# Altium PCB bmsSlavePCB.PcbDoc (part 2 of 2)
Units mil, origin at the board's own origin, x right, y up, seen from the top; angles counter-clockwise.
Board outline 13750 x 2750 mil, 2 copper layers (Top Layer, Bottom Layer); 264 components, 181 nets, 623 pads, 9 vias.
Unrouted connection lines stored in the file: 225.
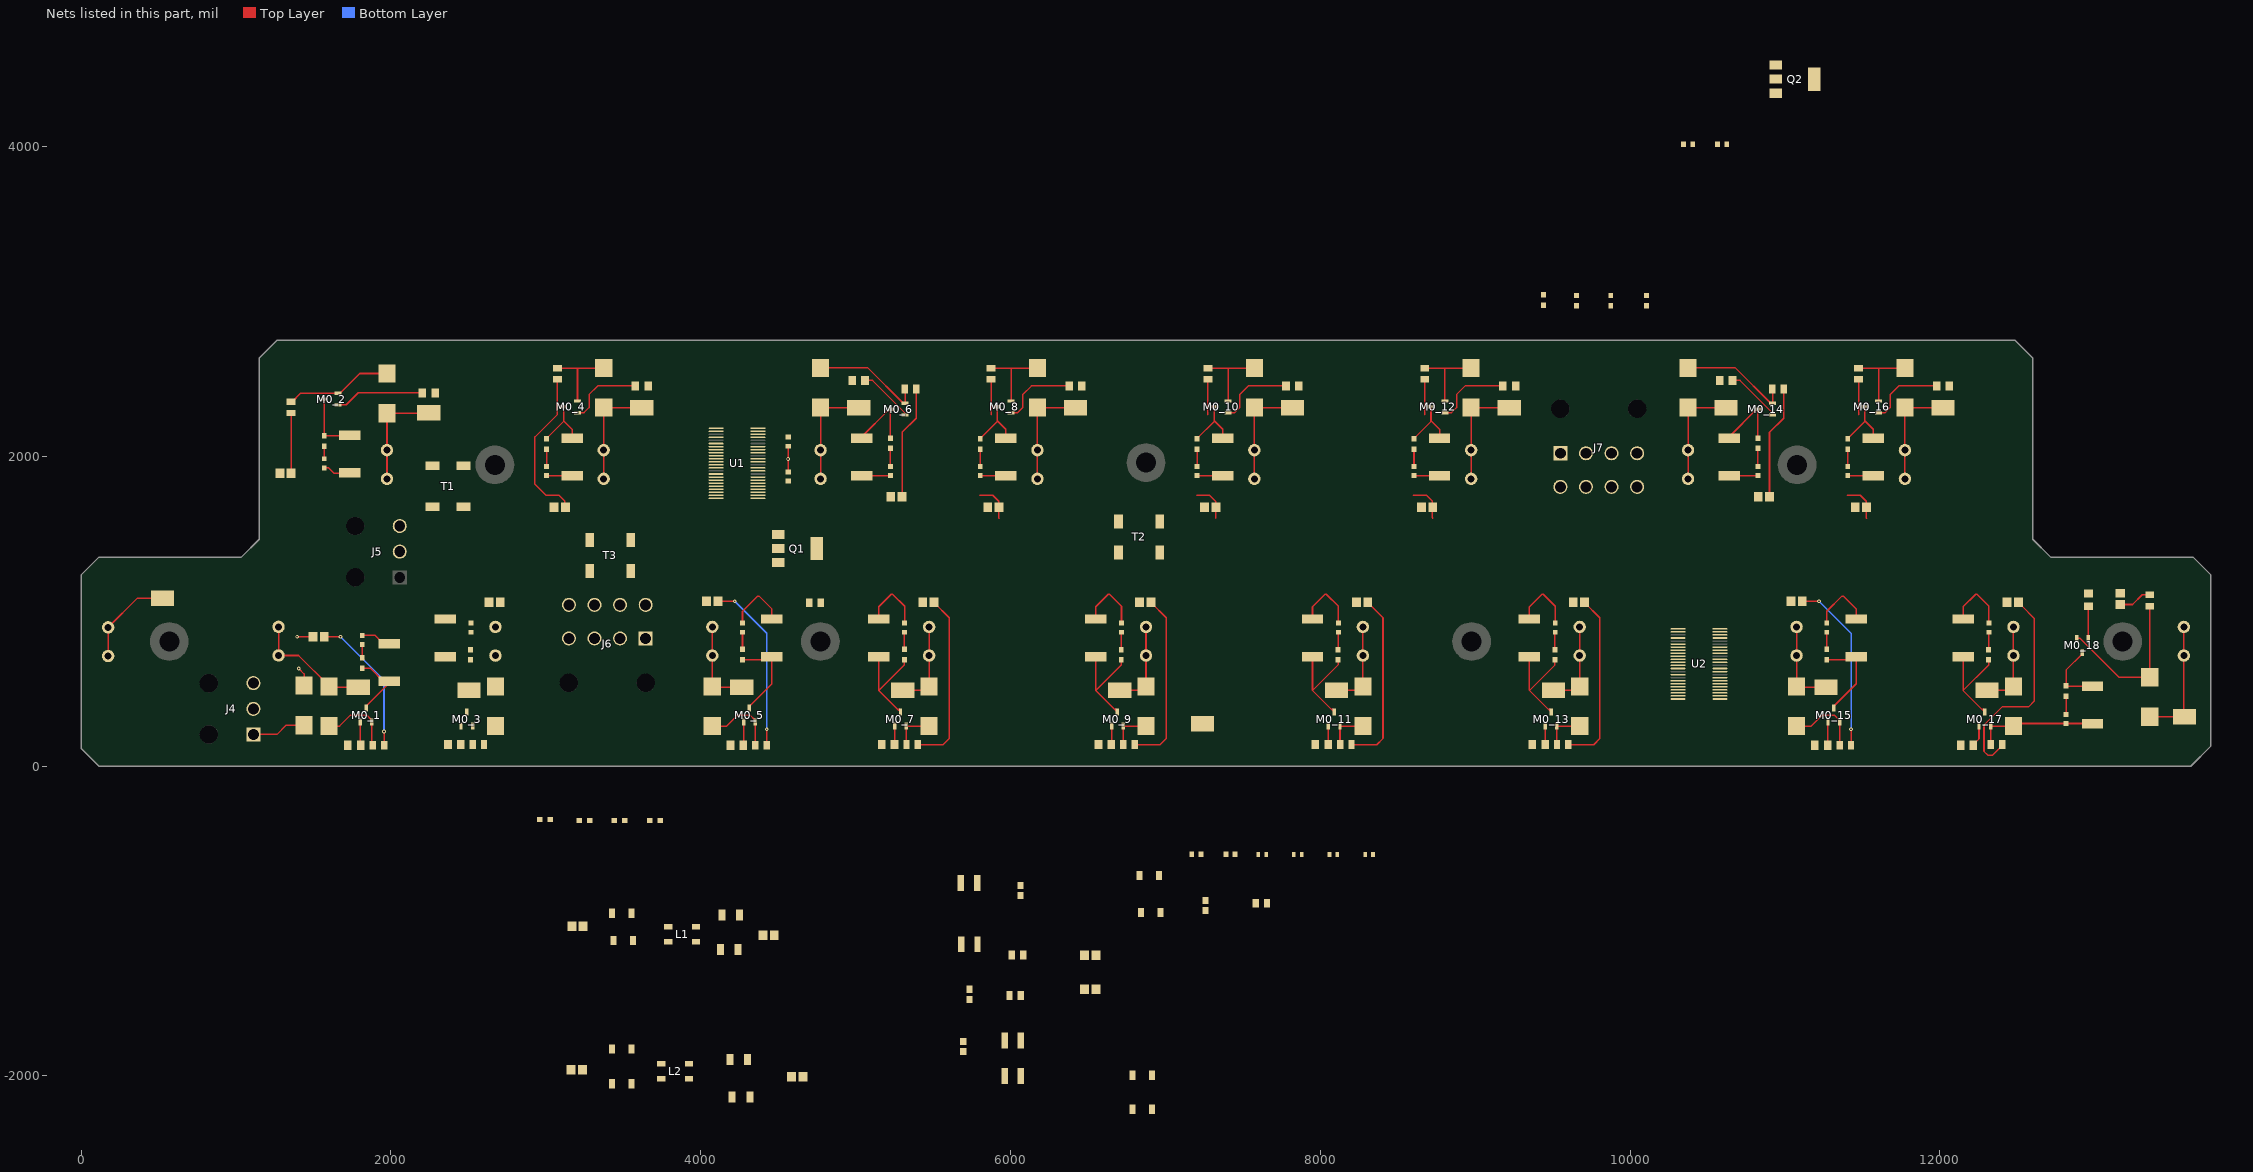
[diagram p2: the nets of this part, all layers, seen from the top]

## Part data
C0_1 C0_2 C0_3 C0_4 C0_5 C0_6 C0_7 C0_8 C0_9 C0_10 C0_11 C0_12 C0_13 C0_14 C0_15 C0_16 C0_17 C0_18 C6 C7 C8 C9 C10 C16: library part CMP-13271-003077-1, "CL21 Series 0805 10nF 100V ±10% Tolerance X7R Multilayer Ceramic Chip Capacitor", Capacitance=10nF, Case Code (Imperial)=0805, Case Code (Metric)=2012, Dielectric=X7R, Max Operating Temperature=125°C, Min Operating Temperature=-55°C, Package Quantity=1, Tolerance=10%, Voltage=100V, Case/Package=0805, Contact Plating=Tin, Depth=1.25mm, Height=0.65mm, Length=2mm, Material=Ceramic, Mount="Surface Mount", Packaging="Tape and Reel", Radiation Hardening=No, Thickness=0.03inch, Voltage Rating=100V, Width=0.049inch
  C6: Part No.=CL21B103KCANNNC
C1 C4 C12 C15: library part CMP-13271-004036-1, "Cap Ceramic 100nF 100V X7R ±10% Pad SMD 0603 +125°C T/R", Capacitance=100nF, Case Code (Imperial)=0603, Case Code (Metric)=1608, Max Operating Temperature=125°C, Min Operating Temperature=-55°C, Tolerance=10%, Voltage Rating=100V, Case/Package=0603, Length=0.063inch, Mount="Surface Mount", Packaging="Cut Tape", Thickness=0.035inch, Width=0.031inch
C2 C3 C5 C11 C13 C14: library part CMP-03422-000761-2, "CAP CER 1UF 50V X7R 0603", Capacitance=1uF, Case Code (Imperial)=0603, Case Code (Metric)=1608, Dielectric=X7R, Max Operating Temperature=125°C, Min Operating Temperature=-55°C, Package Quantity=4000, Resistor Type=Ceramic, Tolerance=10%, Voltage Rating=50V, Case/Package=0603, Halogen Free="Halogen Free", Lead Free="Lead Free", Length=0.063inch, Mount="Surface Mount", Packaging="Tape and Reel", Termination=SMD/SMT, Thickness=0.035inch, Voltage Rating (DC)=50V, Weight=7.1E-05oz, Width=0.031inch
DS0_1 DS0_2 DS0_3 DS0_4 DS0_5 DS0_6 DS0_7 DS0_8 DS0_9 DS0_10 DS0_11 DS0_12 DS0_13 DS0_14 DS0_15 DS0_16 DS0_17 DS0_18: library part CMP-2100-03578-1, "Chip LED, Red, 5 V, 25 mA, -40 to 85 degC, 2-Pin SMD (0603), RoHS, Tape and Reel", Case/Package=0603, Colour=Red, Forward Voltage=2.2V, Manufacturer="Everlight Electronics", Package Description="2-Pin Surface Mount Device, Body 1.6 x 0.8 mm", Datasheet URL=https://datasheet.ciiva.com/4688/el-19-217-r6c-al1m2vy-3tpdf-187026-4688713.pdf, Datasheet Version="Rev. 1, 01/2005", Lead Free=LeadFree, Lens Style=Clear, Manufacturer URL=http://www.everlight.com/, Package Reference=0603, RoHSCompliant=false
F0_1 F0_2 F0_3 F0_4 F0_5 F0_6 F0_7 F0_8 F0_9 F0_10 F0_11 F0_12 F0_13 F0_14 F0_15 F0_16 F0_17 F0_18 F1: library part OMT125, "SCHURTER   3404.0112.11   FUSE, 1/2A, 125VDC, SMT", Case/Package=SMD/SMT, Current=1A, Flammability Rating="UL94 V-0", Manufacturer 1=Schurter, Manufacturer Part Number 1=3404.0114.11, Max Operating Temperature=85°C, Max Voltage Rating (AC)=125V, Min Operating Temperature=-55°C, Package Quantity=100, Power Dissipation=88mW, Approvals=cURus,cULus,UL, Blow Characteristic="TIME DELAY", Body Material=Thermoplastic, Category=Fuses, ComponentLink1Description=https://datasheet.ciiva.com/4486/typ-omt-125-14932-4486467.pdf?src-supplier=Mouser, ComponentLink1URL=https://datasheet.ciiva.com/4486/typ-omt-125-14932-4486467.pdf?src-supplier=Mouser, ComponentLink2Description=https://datasheet.ciiva.com/26876/getdatasheetpartid-627585-26876503.pdf?src-supplier=Verical, ComponentLink2URL=https://datasheet.ciiva.com/26876/getdatasheetpartid-627585-26876503.pdf?src-supplier=Verical, ComponentLink3Description=https://datasheet.ciiva.com/17402/typ-omt-125-17402981.pdf?src-supplier=Avnet+Europe, ComponentLink3URL=https://datasheet.ciiva.com/17402/typ-omt-125-17402981.pdf?src-supplier=Avnet+Europe, ComponentLink4Description=https://datasheet.ciiva.com/1549/typ-omt-125-1549883.pdf?src-supplier=Element14, ComponentLink4URL=https://datasheet.ciiva.com/1549/typ-omt-125-1549883.pdf?src-supplier=Element14, ComponentLink5Description=https://datasheet.ciiva.com/8264/typ-omt-125-8264396.pdf?src-supplier=Avnet, ComponentLink5URL=https://datasheet.ciiva.com/8264/typ-omt-125-8264396.pdf?src-supplier=Avnet, Contact Material="Copper Alloy", Contact Plating=Tin, Current Rating=1A, Depth=3.1mm, Fuse Current=1A, Fuse Size="7.4 X 3.1mm", Fuse Type="Board Mount (Cartridge Style Excluded)", Height=0.102inch, Housing Material=Thermoplastic, Length=7.4mm, Max Voltage Rating (DC)=125V, Mount="Surface Mount,PCB", Number of Pins=2, Packaging=Bag, Pricing 1="1=0.67000, 50=0.56400, 100=0.43100, 500=0.42300, 1000=0.38171 (USD)", Radiation Hardening=No, REACH SVHC="No SVHC", RoHS=Yes, RoHS Compliant=Yes, Series="OMT 125", Stock 1=1439, Supplier 1=Digi-Key, Terminal Material=Tin, Termination=SMD/SMT, Voltage Rating=125V, Voltage Rating (AC)=125V, Voltage Rating (DC)=125V, Width=0.122inch
J0_1 J0_2 J0_3 J0_4 J0_5 J0_6 J0_7 J0_8 J0_9 J0_10 J0_11 J0_12 J0_13 J0_14 J0_15 J0_16 J0_17 J0_18 J1_1 J1_2 J1_3 J1_4 J1_5 J1_6 J1_7 J1_8 J1_9 J1_10 J1_11 J1_12 J1_13 J1_14 J1_15 J1_16 J1_17 J1_18 J2 J3: library part 0856-0-15-20-82-14-11-0, "90 thou stroke"
J4 J5: "Molex Mini-Fit 3 Position Board Connector, RIght Angle", Mfr_Name="Molex Connector Corporation", Copyright="Copyright (C) 2021 Ultra Librarian. All rights reserved.", Digi-Key_Part_Number_1=WM24158-ND, Manufacturer_Part_Number=1726480103, RefDes=RefDes, Type=DEV
J6 J7: "Molex Mini-Fit 8 Position Board Header, RIght Angle", Mfr_Name="Molex Connector Corporation", Copyright="Copyright (C) 2021 Ultra Librarian. All rights reserved.", Manufacturer_Part_Number=26013144, RefDes=RefDes, Type=DEV
L1 L2: library part CMP-06045-000059-1, "CMC 100UH 200MA 2LN SMD AEC-Q200", Case Code (Imperial)=1812, Case Code (Metric)=4532, Current=200mA, DC Resistance (DCR)=2R, Inductance=100uH, Max Operating Temperature=125°C, Min Operating Temperature=-40°C, Package Quantity=1, Test Frequency=1MHz, Tolerance=50%, Voltage Rating=50V, Case/Package=1812, Current Rating=200mA, DC Current=200mA, Depth=3.4mm, Height=2.6mm, Lead Free="Lead Free", Length=4.5mm, Max DC Current=200mA, Military Standard=Not, Mount="Surface Mount", Number of Lines=2, Packaging="Tape and Reel", Radiation Hardening=No, REACH SVHC="No SVHC", Shielding=Unshielded, Termination=SMD/SMT, Weight=0.005997oz, Width=0.126inch
M0_1 M0_2 M0_3 M0_4 M0_5 M0_6 M0_7 M0_8 M0_9 M0_10 M0_11 M0_12 M0_13 M0_14 M0_15 M0_16 M0_17 M0_18: "Trans Mosfet P-ch 20V 3.1A 3-PIN SOT-23 T/r / Mosfet P-ch 20V 3.1A SOT23-3", Case/Package=SOT-23-3, Continuous Drain Current (ID)=3.1A, Drain to Source Breakdown Voltage=-20V, Drain to Source Resistance=112mR, Drain to Source Voltage (Vdss)=20V, Gate to Source Voltage (Vgs)=8V, Input Capacitance=405pF, Manufacturer 1="Vishay Siliconix", Max Operating Temperature=150°C, Max Power Dissipation=1.6W, Min Operating Temperature=-55°C, Package Quantity=1, Supplier Part Number 1=SI2301CDS-T1-E3CT-ND, Threshold Voltage=-400mV, Category=MOSFETs, ComponentLink1Description=https://datasheet.ciiva.com/4442/si2301cd-244544-4442236.pdf?src-supplier=Mouser, ComponentLink1URL=https://datasheet.ciiva.com/4442/si2301cd-244544-4442236.pdf?src-supplier=Mouser, ComponentLink2Description=https://datasheet.ciiva.com/22652/1719653-22652314.pdf?src-supplier=Element14, ComponentLink2URL=https://datasheet.ciiva.com/22652/1719653-22652314.pdf?src-supplier=Element14, ComponentLink3Description=https://datasheet.ciiva.com/2957/si2301cd-2957335.pdf?src-supplier=Digi-Key, ComponentLink3URL=https://datasheet.ciiva.com/2957/si2301cd-2957335.pdf?src-supplier=Digi-Key, ComponentLink4Description=https://datasheet.ciiva.com/2957/si2301cd-2957336.pdf?src-supplier=Digi-Key, ComponentLink4URL=https://datasheet.ciiva.com/2957/si2301cd-2957336.pdf?src-supplier=Digi-Key, ComponentLink5Description=https://datasheet.ciiva.com/11160/si2301cd-11160982.pdf?src-supplier=Avnet, ComponentLink5URL=https://datasheet.ciiva.com/11160/si2301cd-11160982.pdf?src-supplier=Avnet, ComponentLink6Description=https://datasheet.ciiva.com/26137/si2301cd-26137818.pdf?src-supplier=Avnet+Europe, ComponentLink6URL=https://datasheet.ciiva.com/26137/si2301cd-26137818.pdf?src-supplier=Avnet+Europe, Element Configuration=Single, Fall Time=35ns, Height=1.02mm, Lead Free="Lead Free", Length=3.04mm, Manufacturer Part Number 1=SI2301CDS-T1-E3, Mount="Surface Mount", Number of Channels=1, Number of Pins=3, Packaging="Tape and Reel", Polarity=P-CHANNEL, Pricing 1="1=0.51000, 10=0.38800, 100=0.24160, 500=0.16530, 1000=0.12716 (USD)", Radiation Hardening=No, Rds On Max=112mR, REACH SVHC=Unknown, Rise Time=35ns, RoHS=Yes, RoHS Compliant=Yes, Series=TrenchFET®, Stock 1=82098, Supplier 1=Digi-Key, Turn-Off Delay Time=30ns, Turn-On Delay Time=11ns, Weight=0.050717oz, Width=1.4mm
Q1 Q2: library part CMP-1048-00451-1, "100 V, 2 A, Low VCE(sat), NPN Transistor, 4-Pin SOT-223, Pb-Free, Tape and Reel", Manufacturer="On Semiconductor", ComponentLink1Description="Manufacturer URL", ComponentLink1URL=http://www.onsemi.com/, ComponentLink2Description=Datasheet, ComponentLink2URL=http://www.onsemi.cn/pub_link/Collateral/NSS1C201MZ4-D.PDF, ComponentLink3Description="Package Specification", ComponentLink3URL=http://www.onsemi.com/pub_link/Collateral/318E-04.PDF, DatasheetVersion="Rev. 4", IC Continuous (A)=2, Mounting Technology="Surface Mount", PackageDescription="4-Pin Small Outline Transistor, Body 6.5 x 3.5 mm, Pitch 2.3 mm", PackageReference=SOT-223-4-318E-04, PackageVersion="Rev. N, 08/2009", Packing="Tape and Reel", PartNumber=NSS1C201MZ4T3G, Polarity=NPN, RoHS=TRUE
R0_1 R0_2 R0_3 R0_4 R0_5 R0_6 R0_7 R0_8 R0_9 R0_10 R0_11 R0_12 R0_13 R0_14 R0_15 R0_16 R0_17 R0_18 R13 R26 R27 R31: library part CMP-2001-04655-1, "100R 1/4W 5% 0805", Manufacturer="KOA Speer", Part Number=RK73B2ATTD101J
R1_1 R1_2 R1_3 R1_4 R1_5 R1_6 R1_7 R1_8 R1_9 R1_10 R1_11 R1_12 R1_13 R1_14 R1_15 R1_16 R1_17 R1_18: library part CMP-1013-00086-1, "3K3 0.125W 5% 0805 (2012 Metric)  SMD", Case-EIA=0805, Case-Metric=2012, Power="0.125 W", Tolerance="5 %", Technology=SMT
R2_1 R2_2 R2_3 R2_4 R2_5 R2_6 R2_7 R2_8 R2_9 R2_10 R2_11 R2_12 R2_13 R2_14 R2_15 R2_16 R2_17 R2_18: "Res Thick Film 2512 16 Ohm 1% 2W ±100ppm/C Pad SMD Automotive T/R", Case Code (Imperial)=2512, Case Code (Metric)=6432, Manufacturer 1="TE Connectivity", Max Operating Temperature=155°C, Min Operating Temperature=-55°C, Number of Resistors=1, Power Rating=2W, Resistance=16R, Resistance Tolerance=1%, Resistor Type="Thick Film,Power resistor", Supplier Part Number 1=A115989CT-ND, Temperature Coefficient=100ppm/°C, Voltage Rating=250V, Case/Package=2512, Category="Chip SMD Resistors", ComponentLink1Description=https://datasheet.ciiva.com/25610/0900766b81096b90-25610624.pdf?src-supplier=RSComponents, ComponentLink1URL=https://datasheet.ciiva.com/25610/0900766b81096b90-25610624.pdf?src-supplier=RSComponents, ComponentLink2Description=https://datasheet.ciiva.com/46391/1610601-46391497.pdf?src-supplier=Element14, ComponentLink2URL=https://datasheet.ciiva.com/46391/1610601-46391497.pdf?src-supplier=Element14, ComponentLink3Description=https://datasheet.ciiva.com/7657/1610601-7657546.pdf?src-supplier=Element14, ComponentLink3URL=https://datasheet.ciiva.com/7657/1610601-7657546.pdf?src-supplier=Element14, Depth=3.2mm, ELV=Compliant, Height=0.55mm, Length=6.3mm, Manufacturer Part Number 1=352116RFT, Mount="Surface Mount", Number of Terminations=2, Packaging="Tape and Reel", Pricing 1="1=0.83000, 10=0.61200, 100=0.35610, 1000=0.19972 (USD)", REACH SVHC="No SVHC", RoHS=Yes, RoHS Compliant=Yes, Series=3521, Stock 1=79023, Supplier 1=Digi-Key, Technology="THICK FILM", Termination=Solder, Tolerance=1%, Voltage Rating (DC)=250V
R3_1 R3_2 R3_3 R3_4 R3_5 R3_6 R3_7 R3_8 R3_9 R3_10 R3_11 R3_12 R3_13 R3_14 R3_15 R3_16 R3_17 R3_18: "±1% ±200ppm/℃ 75Ω 0.1W 0603 Chip Resistor - Surface Mount ROHS", Case Code (Imperial)=0603, Case Code (Metric)=1608, Manufacturer 1=Panasonic, Manufacturer Part Number 1=ERJ-PB3B1002V, Max Operating Temperature=155°C, Max Power Dissipation=200mW, Min Operating Temperature=-55°C, Resistance=10kR, Resistor Type="Thick Film", Temperature Coefficient=50ppm/°C, Tolerance=0.1%, Case/Package=0603, Category="Chip SMD Resistors", ComponentLink1Description=https://industrial.panasonic.com/sa/system/files/data/download/catalog/id_fixed-resistors_e_2.pdf?src-supplier=Digi-Key, ComponentLink1URL=https://industrial.panasonic.com/sa/system/files/data/download/catalog/id_fixed-resistors_e_2.pdf?src-supplier=Digi-Key, ComponentLink2Description=https://industrial.panasonic.com/cdbs/www-data/pdf/RDM0000/DMM0000COL5.pdf?src-supplier=Digi-Key, ComponentLink2URL=https://industrial.panasonic.com/cdbs/www-data/pdf/RDM0000/DMM0000COL5.pdf?src-supplier=Digi-Key, Features="Automotive AEC-Q200", Height - Seated (Max)=0.022inch, Length=0.063inch, Number of Terminations=2, Packaging="Tape and Reel", Pricing 1="1=0.23000, 10=0.19100, 25=0.13920, 50=0.10100, 100=0.07480, 250=0.05744, 500=0.04524, 1000=0.03132 (USD)", RoHS=Yes, Stock 1=3, Width=0.032inch
R4 R5 R18 R19: "Res Thick Film 1206 300 Ohm 1% 1/4W +/-100ppm/ßC Molded SMD Paper T/R", Case Code (Imperial)=1206, Case Code (Metric)=3216, Manufacturer 1=Yageo, Max Operating Temperature=155°C, Max Power Dissipation=250mW, Min Operating Temperature=-55°C, Package Quantity=1, Resistance=300R, Resistor Type="Thick Film", Supplier Part Number 1=311-300FRCT-ND, Temperature Coefficient=100ppm/°C, Tolerance=1%, Voltage Rating=200V, Case/Package=1206, Category="Chip SMD Resistors", ComponentLink1Description=https://datasheet.ciiva.com/2461/pyu-rc1206-51-rohs-l-4-2461311.pdf?src-supplier=Digi-Key, ComponentLink1URL=https://datasheet.ciiva.com/2461/pyu-rc1206-51-rohs-l-4-2461311.pdf?src-supplier=Digi-Key, ComponentLink2Description=https://datasheet.ciiva.com/2461/pyu-rc1206-51-rohs-l-4-2461312.pdf?src-supplier=Digi-Key, ComponentLink2URL=https://datasheet.ciiva.com/2461/pyu-rc1206-51-rohs-l-4-2461312.pdf?src-supplier=Digi-Key, ComponentLink3Description=https://datasheet.ciiva.com/2461/pyu-rc1206-51-rohs-l-4-2461313.pdf?src-supplier=Digi-Key, ComponentLink3URL=https://datasheet.ciiva.com/2461/pyu-rc1206-51-rohs-l-4-2461313.pdf?src-supplier=Digi-Key, ComponentLink4Description=https://datasheet.ciiva.com/17471/pyu-rc1206-51-rohs-l-4-17471032.pdf?src-supplier=Future+Electronics, ComponentLink4URL=https://datasheet.ciiva.com/17471/pyu-rc1206-51-rohs-l-4-17471032.pdf?src-supplier=Future+Electronics, Construction=Rectangular, Depth=1.6mm, Features="Moisture Resistant", Height=0.026inch, Lead Free="Lead Free", Length=0.122inch, Manufacturer Part Number 1=RC1206FR-07300RL, Military Standard=Not, Mount="Surface Mount", Number of Terminations=2, Packaging="Tape and Reel", Power Rating=250mW, Pricing 1="1=0.10000, 10=0.07400, 100=0.03010, 1000=0.01353, 2500=0.01174 (USD)", RoHS=Yes, RoHS Compliant=Yes, Series=RC, Size Code=1206, Stock 1=22, Supplier 1=Digi-Key, Termination=SMD/SMT, Voltage Rating (DC)=200V, Width=0.063inch
R6 R20 R25 R28: library part CMP-2005-03479-1, "100R 1/2W 5% 1210", Manufacturer=Panasonic, Part Number=ERJ-14YJ101U
R7 R8 R9 R10 R32 R33 R34 R35: "Res Thick Film 0603 10K Ohm 0.1% 0.2W(1/5W) ±50ppm/°C Pad SMD Automotive T/R", Case Code (Imperial)=0603, Case Code (Metric)=1608, Manufacturer 1=Panasonic, Max Operating Temperature=155°C, Max Power Dissipation=200mW, Min Operating Temperature=-55°C, Resistance=10kR, Resistor Type="Thick Film", Supplier Part Number 1=P20086CT-ND, Temperature Coefficient=50ppm/°C, Tolerance=0.1%, Case/Package=0603, Category="Chip SMD Resistors", ComponentLink1Description=https://industrial.panasonic.com/sa/system/files/data/download/catalog/id_fixed-resistors_e_2.pdf?src-supplier=Digi-Key, ComponentLink1URL=https://industrial.panasonic.com/sa/system/files/data/download/catalog/id_fixed-resistors_e_2.pdf?src-supplier=Digi-Key, ComponentLink2Description=https://industrial.panasonic.com/cdbs/www-data/pdf/RDM0000/DMM0000COL5.pdf?src-supplier=Digi-Key, ComponentLink2URL=https://industrial.panasonic.com/cdbs/www-data/pdf/RDM0000/DMM0000COL5.pdf?src-supplier=Digi-Key, Features="Automotive AEC-Q200", Height - Seated (Max)=0.022inch, Length=0.063inch, Manufacturer Part Number 1=ERJ-PB3B1002V, Number of Terminations=2, Packaging="Tape and Reel", Pricing 1="1=0.23000, 10=0.19100, 25=0.13920, 50=0.10100, 100=0.07480, 250=0.05744, 500=0.04524, 1000=0.03132 (USD)", RoHS=Yes, Stock 1=3, Supplier 1=Digi-Key, Width=0.032inch
R11 R12 R14 R15: library part CMP-1014-00373-1, "62R 0.25W 1% 1206 (3216 Metric)  SMD", Case-EIA=1206, Case-Metric=3216, Power="0.25 W", Tolerance="1 %", Technology=SMT
R16 R17 R23 R24: library part CMP-03412-027409-1, "RES SMD 49.9 OHM 1% 1/4W 1206", Manufacturer=Yageo, Package=AC1206, Power Rating=0.25W, Resistance=49.9Ω, Temperature="-55°C to +155°C", Temperature Range High=+155°C, Temperature Range Low=-55°C, Tolerance=0.01, Voltage Rating=200V, Automotive=Yes, Automotive Grade="Grade 0", Category=Res, ComponentLink2Description=Datasheet, ComponentLink2URL=http://www.yageo.com/NewPortal/yageodocoutput?fileName=/pdf/R-Chip/PYu-AC_51_RoHS_L_6.pdf, Composition="Thick Film", Device Class L1="Passive Components", Device Class L2=Resistors, Device Class L3="Chip SMD Resistors", Digikey Description="RES SMD 49.9 OHM 1% 1/4W 1206", Footprint Url=http://www.yageo.com/exep/pages/download/literatures/PYu-R_Mount_10.pdf, Height=0.65mm, Ipc Land Pattern Name=RESC310160X55, Lead Free=Yes, Manufacturer Part Number=AC1206FR-0749R9L, Mouser Description="Thick Film Resistors 1/4W 49.9ohm 1% AEC-Q200", Octopart=https://octopart.com/ac1206fr-0749r9l-yageo-25508608, RoHS=TRUE, Series=AC
R21 R29: library part CMP-2000-03933-1, Manufacturer=Yageo, Part Number=RC0603FR-071K21L
R22 R30: library part CMP-2000-04142-1, Manufacturer=Yageo, Part Number=RC0603FR-07806RL
T1 T2 T3: "No Description Available", Built_By=EMA_Cory, Copyright="Copyright (C) 2018 Accelerated Designs. All rights reserved", Manufacturer_Part_Number=PE-68386NLT, RefDes=RefDes, SourceLibrary=Pulse_Electronics_2019-12-18, Type=DEV, Vendor="Pulse Electronics Corporation"
TP0_1 TP0_2 TP0_3 TP0_4 TP0_5 TP0_6 TP0_7 TP0_8 TP0_9 TP0_10 TP0_11 TP0_12 TP0_13 TP0_14 TP0_15 TP0_16 TP0_17 Vbot Vmid Vtop: library part "PCB Test Point", "PCB Test Point", Manufacturer="RIT Racing", ComponentLink1Description=Datasheet, ComponentLink1URL=http://www.mouser.com/ds/2/215/005-5009-743680.pdf, PartNumber=N/A, Published=22Oct2016, Publisher=T.Tallo, Status=Active, TargetLibrary=RITRacing-Connectors
U1 U2: library part CMP-0471-00242-1, "Multicell Battery Monitor, 60 V Vin MAX, 48-pin SOP (G-48), -40 to 125 degC, Pb-Free, Tape and Reel", Manufacturer="Linear Technology", Battery Chemistry="Li-Ion, Li-Polymer, NiMH", ComponentLink1Description="Manufacturer URL", ComponentLink1URL=http://www.linear.com/, ComponentLink2Description=Datasheet, ComponentLink2URL=http://cds.linear.com/docs/en/datasheet/680412f.pdf, ComponentLink3Description="Package Specification", ComponentLink3URL=http://cds.linear.com/docs/en/packaging/05081887_0_G48.pdf, Mounting Technology="Surface Mount", Number of Cells="> 1000 V of stacked Li-Ion cells", PackageDescription="48-Pin Plastic SSOP, Body 12.8 x 5.3 mm, Pitch 0.5 mm", PackageReference=G-48, PackageVersion="Rev. Ã˜, 01/2011", Packing="Tape and Reel", PartNumber=LTC6804HG-1#TRPBF, RoHS=TRUE, Type of Charger="Battery Stack Monitor", Vin Max(V)=60

## Free pads (board coordinates)
  round 250 hole 128: 0(570,805) 1(2671.67,1945) 2(4773.33,805) 3(6875,1960) 4(8976.67,805) 5(11078.33,1945) 6(13180,805)

## Via types
v1: diameter 24, hole 12, Top Layer to Bottom Layer, 9 vias

## Nets (pads, with @x,y where several pads share a name; then routed paths per layer and width w, separated by ;. In a path a pad name is that pad's centre, name@x,y a point inside that pad or via, vN(x,y) a via of type N, cw(c..) or ccw(c..) an arc to the next point about the centre after c; other vN are vias at no path point)
1-C1: C0_1.1 C0_2.2 R0_1.1 U1.24 | length 922.6
  Top Layer w10: C0_1.1@1570,835 v1(1675,835) ; v1@1955,225 v1(1955.71,224.29) 1956.42,223.58 R0_1.1@1956.42,135
  Bottom Layer w10: v1(1675,835) 1955.71,554.29 v1(1955.71,224.29)
1-C2: C0_2.1 C0_3.2 R0_2.1 U1.22 | length 390.6
  Top Layer w10: R0_2.1@1355,2280 1356.45,2278.55 C0_2.1@1356.45,1890
1-C3: C0_3.1 C0_4.2 R0_3.1 U1.20
1-C4: C0_4.1 C0_5.2 R0_4.1 U1.18 | length 1017.7
  Top Layer w10: R0_4.1@3075,2497.16 3075,2270 2930,2125 2930,1820 3001.46,1748.54 3085.25,1748.54 3124.01,1709.78 3124.01,1672.44 C0_4.1@3126.45,1670
1-C5: C0_5.1 R0_5.1 U1.16 | length 1126.1
  Top Layer w10: C0_5.1@4111.45,1065 v1(4220,1065) ; v1@4425,240 v1(4426.42,238.58) R0_5.1@4426.42,135
  Bottom Layer w10: v1(4220,1065) 4426.42,858.58 v1(4426.42,238.58)
1-C7: U1.12
1-C8: C0_7.1 C0_8.2 R0_7.1 U1.10 | length 1141
  Top Layer w10: R0_7.1@5401.42,138.91 5565,138.91 5605,178.91 5605,958.36 5506.45,1056.91 C0_7.1@5506.45,1058.91
1-C9: C0_8.1 C0_9.2 R0_8.1 U1.8 | length 447.3
  Top Layer w10: 5801.46,1748.54 5885.25,1748.54 5924.01,1709.78 5924.01,1672.44 C0_8.1@5926.45,1670 ; 5875,2270 R0_8.1@5875,2497.16 ; C0_8.1@5924.01,1639.78 5924.01,1602.44 5926.45,1600
1-C10: C0_9.1 R0_9.1 U1.6 | length 1141
  Top Layer w10: R0_9.1@6801.42,138.91 6965,138.91 7005,178.91 7005,958.36 6906.45,1056.91 C0_9.1@6906.45,1058.91
1-S1: R1_1.1 U1.25
1-S2: R1_2.1 U1.23
1-S3: R1_3.1 U1.21
1-S4: R1_4.1 U1.19
1-S5: R1_5.1 U1.17
1-S7: R1_6.1 U1.13
1-S8: R1_7.1 U1.11
1-S9: R1_8.1 U1.9
1-S10: R1_9.1 U1.7
2-C1: C0_10.1 C0_11.2 R0_10.1 U2.24 | length 447.3
  Top Layer w10: 7201.46,1748.54 7285.25,1748.54 7324.01,1709.78 7324.01,1672.44 C0_10.1@7326.45,1670 ; 7275,2270 R0_10.1@7275,2497.16 ; C0_10.1@7324.01,1639.78 7324.01,1602.44 7326.45,1600
2-C2: C0_11.1 C0_12.2 R0_11.1 U2.22 | length 1141
  Top Layer w10: R0_11.1@8201.42,138.91 8365,138.91 8405,178.91 8405,958.36 8306.45,1056.91 C0_11.1@8306.45,1058.91
2-C3: C0_12.1 C0_13.2 R0_12.1 U2.20 | length 447.3
  Top Layer w10: 8601.46,1748.54 8685.25,1748.54 8724.01,1709.78 8724.01,1672.44 C0_12.1@8726.45,1670 ; 8675,2270 R0_12.1@8675,2497.16 ; C0_12.1@8724.01,1639.78 8724.01,1602.44 8726.45,1600
2-C4: C0_13.1 C0_14.2 R0_13.1 U2.18 | length 1141
  Top Layer w10: R0_13.1@9601.42,138.91 9765,138.91 9805,178.91 9805,958.36 9706.45,1056.91 C0_13.1@9706.45,1058.91
2-C5: C0_14.1 R0_14.1 U2.16 | length 732.9
  Top Layer w10: C0_14.1@10900,1740 10900,2155 10991.42,2246.42 R0_14.1@10991.42,2435
2-C7: C0_15.1 C0_16.2 R0_15.1 U2.12 | length 1126.1
  Top Layer w10: C0_15.1@11111.45,1065 v1(11220,1065) ; v1@11425,240 v1(11426.42,238.58) R0_15.1@11426.42,135
  Bottom Layer w10: v1(11220,1065) 11426.42,858.58 v1(11426.42,238.58)
2-C8: C0_16.1 C0_17.2 R0_16.1 U2.10 | length 447.3
  Top Layer w10: 11401.46,1748.54 11485.25,1748.54 11524.01,1709.78 11524.01,1672.44 C0_16.1@11526.45,1670 ; 11475,2270 R0_16.1@11475,2497.16 ; C0_16.1@11524.01,1639.78 11524.01,1602.44 11526.45,1600
2-C9: C0_17.1 C0_18.2 R0_17.1 U2.8 | length 1400.9
  Top Layer w10: R0_17.1@12401.42,138.91 12401.42,131.04 12340.38,70 12310,70 12285,95 12285,265 12405,385 12575,385 12610,420 12610,953.36 12530.08,1033.28 12506.45,1056.91 C0_17.1@12506.45,1058.91
2-C10: C0_18.1 R0_18.1 U2.6 | length 216
  Top Layer w10: C0_18.1@13165,1043.55 13243.55,1043.55 13306.42,1106.42 R0_18.1@13355,1106.42
2-S1: R1_10.1 U2.25
2-S2: R1_11.1 U2.23
2-S3: R1_12.1 U2.21
2-S4: R1_13.1 U2.19
2-S5: R1_14.1
2-S7: R1_15.1 U2.13
2-S8: R1_16.1 U2.11
2-S9: R1_17.1 U2.9
2-S10: R1_18.1 U2.7
GPI02-1: U1.28
GPI02-2: U2.28
GPIO1-1: J6.5 R7.2 U1.27
GPIO1-2: J7.5 R32.2 U2.27
GPIO2-1: J6.6 R8.2
GPIO2-2: J7.6 R33.2
GPIO3-1: J6.7 R9.2 U1.29
GPIO3-2: J7.7 R34.2 U2.29
GPIO4-1: J6.8 R10.2 U1.32
GPIO4-2: J7.8 R35.2 U2.32
IMA-1: L1.4 R11.2 U1.41
IMA-2: R24.1 T2.3 U2.41
IMB-1: R17.1 T2.2 U1.47
IMB-2: L2.1 R14.2 U2.47
In1-A: J4.2 T1.2
In1-B: J4.3 T1.1
IPA-1: L1.1 R12.1 U1.42
IPA-2: R23.2 T2.4 U2.42
IPB-1: R16.2 T2.1 U1.48
IPB-2: L2.4 R15.1 U2.48
NetC0_6_1: C0_6.1 C0_7.2 R0_6.1 | length 732.9
  Top Layer w10: C0_6.1@5300,1740 5300,2155 5391.42,2246.42 R0_6.1@5391.42,2435
NetC1_1: C1.1 Q1.2 Q1.4 R28.1
NetC2_1: C2.1 U1.35
NetC3_1: C3.1 Q1.3 U1.37 U1.40
NetC4_1: C4.1 R6.2 U1.1
NetC6_1: C6.1 R4.1 R5.2
NetC7_1: C7.1 R11.1 R12.2
NetC8_2: C8.2 R14.1 R15.2
NetC9_2: C9.2 R16.1 R17.2
NetC10_2: C10.2 R18.1 R19.2
NetC11_1: C11.1 U2.35
NetC12_1: C12.1 Q2.2 Q2.4 R20.1
NetC13_1: C13.1 Q2.3 U2.37 U2.40
NetC15_1: C15.1 R25.1 U2.1
NetC16_1: C16.1 R23.1 R24.2
NetDS0_1_1: DS0_1.1 R3_1.2 | length 87
  Top Layer w10: R3_1.2@1815,698.47 DS0_1.1@1815,785.47
NetDS0_2_1: DS0_2.1 R3_2.2 | length 82
  Top Layer w10: DS0_2.1@1570,1984.53 R3_2.2@1570,2066.53
NetDS0_2_2: DS0_2.2 F0_1.1 M0_1.2 R0_1.2 R2_2.1 | length 666.1
  Top Layer w10: DS0_2.2@1570,1925.47 1599.53,1925.47 1635,1890 1731.09,1890 R2_2.1@1735,1893.91 ; F0_1.1@1600,258.91 1668.91,258.91 1740,330 1843.9,330 1877.4,296.5 M0_1.2@1877.4,285 1877.4,141.18 R0_1.2@1883.58,135
NetDS0_3_1: DS0_3.1 R3_3.2
NetDS0_3_2: DS0_3.2 F0_2.1 M0_2.2 R0_2.2 R2_3.1 | length 695.4
  Top Layer w10: R0_2.2@1355,2352.84 1362.87,2352.84 1417.44,2407.4 M0_2.2@1660,2407.4 1671.5,2407.4 1799.02,2534.92 F0_2.1@1975,2534.92
NetDS0_4_1: DS0_4.1 R3_4.2 | length 112
  Top Layer w10: DS0_4.1@3005,1934.53 R3_4.2@3005,2046.53
NetDS0_4_2: DS0_4.2 F0_3.1 M0_3.2 R0_3.2 R2_4.1 | length 165.6
  Top Layer w10: DS0_4.2@3005,1875.47 3168.44,1875.47 R2_4.1@3170,1873.91
NetDS0_5_1: DS0_5.1 R3_5.2 | length 112.8
  Top Layer w10: R3_5.2@4270,748.46 R3_5.2@4271.97,750.43 ; R3_5.2@4270,754.96 DS0_5.1@4270,865
NetDS0_5_2: DS0_5.2 F0_4.1 M0_4.2 R0_4.2 R2_5.1 | length 914.4
  Top Layer w10: R0_4.2@3075,2570 3373.38,2570 F0_4.1@3374.29,2570.91 ; M0_4.2@3205,2357.4 3205,2565.05 ; DS0_5.2@4270,923.14 4270,1000 4368.36,1098.36 4376.64,1098.36 4460,1015 R2_5.1@4460,950
NetDS0_6_1: DS0_6.1 R3_6.2 | length 117
  Top Layer w10: DS0_6.1@5225,1934.53 R3_6.2@5225,2051.54
NetDS0_6_2: DS0_6.2 F0_5.1 M0_5.2 R0_5.2 R2_6.1 R13.2 | length 668.4
  Top Layer w10: F0_5.1@4075,258.91 4168.91,258.91 4240,330 4318.9,330 4352.4,296.5 M0_5.2@4352.4,285 4352.4,136.18 R0_5.2@4353.58,135 ; R2_6.1@5040,1873.91 5041.56,1875.47 DS0_6.2@5225,1875.47
NetDS0_7_1: DS0_7.1 R3_7.2 | length 112.8
  Top Layer w10: R3_7.2@5315,752.38 5315,862.42 DS0_7.1@5316.97,864.38
NetDS0_7_2: DS0_7.2 F0_6.1 M0_6.2 R0_6.2 R2_7.1 | length 1153.7
  Top Layer w10: F0_6.1@4774.29,2570.91 5080,2570.91 5308.5,2342.4 M0_6.2@5320,2342.4 5320,2433.58 R0_6.2@5318.58,2435 ; R2_7.1@5150,950 5150,1028.91 5230.86,1109.77 5239.14,1109.77 5316.97,1031.94 DS0_7.2@5316.97,923.44
NetDS0_8_1: DS0_8.1 R3_8.2 | length 112
  Top Layer w10: DS0_8.1@5805,1934.53 R3_8.2@5805,2046.54
NetDS0_8_2: DS0_8.2 F0_7.1 M0_7.2 R0_7.2 R2_8.1 | length 408.7
  Top Layer w10: R0_7.2@5326.42,163.91 5327.4,164.9 M0_7.2@5327.4,258.91 F0_7.1@5475,258.91 ; DS0_8.2@5805,1875.47 5968.44,1875.47 R2_8.1@5970,1873.91
NetDS0_9_1: DS0_9.1 R3_9.2 | length 112.8
  Top Layer w10: R3_9.2@6715,752.38 6715,862.42 DS0_9.1@6716.97,864.38
NetDS0_9_2: DS0_9.2 F0_8.1 M0_8.2 R0_8.2 R2_9.1 | length 927.4
  Top Layer w10: R0_8.2@5875,2570 6173.38,2570 F0_8.1@6174.29,2570.91 ; M0_8.2@6005,2357.4 6005,2565.05 ; R2_9.1@6550,950 6550,1028.91 6630.86,1109.77 6639.14,1109.77 6716.97,1031.94 DS0_9.2@6716.97,923.44
NetDS0_10_1: DS0_10.1 R3_10.2 | length 112
  Top Layer w10: DS0_10.1@7205,1934.53 R3_10.2@7205,2046.54
NetDS0_11_1: DS0_11.1 R3_11.2 | length 112.8
  Top Layer w10: R3_11.2@8115,752.38 8115,862.42 DS0_11.1@8116.97,864.38
NetDS0_11_2: DS0_11.2 F0_10.1 M0_10.2 R0_10.2 R2_11.1 | length 927.4
  Top Layer w10: R0_10.2@7275,2570 7573.38,2570 F0_10.1@7574.29,2570.91 ; M0_10.2@7405,2357.4 7405,2565.05 ; R2_11.1@7950,950 7950,1028.91 8030.86,1109.77 8039.14,1109.77 8116.97,1031.94 DS0_11.2@8116.97,923.44
NetDS0_12_1: DS0_12.1 R3_12.2 | length 112
  Top Layer w10: DS0_12.1@8605,1934.53 R3_12.2@8605,2046.54
NetDS0_12_2: DS0_12.2 F0_11.1 M0_11.2 R0_11.2 R2_12.1 | length 408.7
  Top Layer w10: R0_11.2@8126.42,163.91 8127.4,164.9 M0_11.2@8127.4,258.91 F0_11.1@8275,258.91 ; DS0_12.2@8605,1875.47 8768.44,1875.47 R2_12.1@8770,1873.91
NetDS0_13_1: DS0_13.1 R3_13.2 | length 112.8
  Top Layer w10: R3_13.2@9515,752.38 9515,862.42 DS0_13.1@9516.97,864.38
NetDS0_13_2: DS0_13.2 F0_12.1 M0_12.2 R0_12.2 R2_13.1 | length 927.4
  Top Layer w10: R0_12.2@8675,2570 8973.38,2570 F0_12.1@8974.29,2570.91 ; M0_12.2@8805,2357.4 8805,2565.05 ; R2_13.1@9350,950 9350,1028.91 9430.86,1109.77 9439.14,1109.77 9516.97,1031.94 DS0_13.2@9516.97,923.44
NetDS0_14_1: DS0_14.1 R3_14.2 | length 117
  Top Layer w10: DS0_14.1@10825,1934.53 R3_14.2@10825,2051.54
NetDS0_14_2: DS0_14.2 F0_13.1 M0_13.2 R0_13.2 R2_14.1 | length 428.7
  Top Layer w10: R0_13.2@9526.42,163.91 9527.4,164.9 M0_13.2@9527.4,258.91 F0_13.1@9675,258.91 ; R2_14.1@10640,1873.91 10641.56,1875.47 DS0_14.2@10825,1875.47
NetDS0_15_1: DS0_15.1 R3_15.2 | length 112.8
  Top Layer w10: R3_15.2@11270,748.46 R3_15.2@11271.97,750.43 ; R3_15.2@11270,754.96 DS0_15.1@11270,865
NetDS0_15_2: DS0_15.2 F0_14.1 M0_14.2 R0_14.2 R2_15.1 R27.2 | length 1140.7
  Top Layer w10: F0_14.1@10374.29,2570.91 10680,2570.91 10908.5,2342.4 M0_14.2@10920,2342.4 10920,2433.58 R0_14.2@10918.58,2435 ; DS0_15.2@11270,923.14 11270,1000 11368.36,1098.36 11376.64,1098.36 11460,1015 R2_15.1@11460,950
NetDS0_16_1: DS0_16.1 R3_16.2 | length 112
  Top Layer w10: DS0_16.1@11405,1934.53 R3_16.2@11405,2046.53
NetDS0_16_2: DS0_16.2 F0_15.1 M0_15.2 R0_15.2 R2_16.1 | length 648.4
  Top Layer w10: F0_15.1@11075,258.91 11168.91,258.91 11240,330 11318.9,330 11352.4,296.5 M0_15.2@11352.4,285 11352.4,136.18 R0_15.2@11353.58,135 ; DS0_16.2@11405,1875.47 11568.44,1875.47 R2_16.1@11570,1873.91
NetDS0_17_1: DS0_17.1 R3_17.2 | length 112.8
  Top Layer w10: R3_17.2@12315,752.38 12315,862.42 DS0_17.1@12316.97,864.38
NetDS0_17_2: DS0_17.2 F0_16.1 M0_16.2 R0_16.2 R2_17.1 | length 927.4
  Top Layer w10: R0_16.2@11475,2570 11773.38,2570 F0_16.1@11774.29,2570.91 ; M0_16.2@11605,2357.4 11605,2565.05 ; R2_17.1@12150,950 12150,1028.91 12230.86,1109.77 12239.14,1109.77 12316.97,1031.94 DS0_17.2@12316.97,923.44
NetDS0_18_1: DS0_18.1 R3_18.2 | length 102
  Top Layer w10: DS0_18.1@12815,349.53 R3_18.2@12815,451.53
NetDS0_18_2: DS0_18.2 F0_17.1 M0_17.2 R0_17.2 R2_18.1 | length 760.5
  Top Layer w10: R0_17.2@12326.42,163.91 12327.4,164.9 M0_17.2@12327.4,258.91 F0_17.1@12475,258.91 12491.56,275.47 DS0_18.2@12815,275.47 12983.44,275.47 R2_18.1@12985,273.91
NetF0_1_2: F0_1.2 J0_1.0 J1_1.0 TP0_1.1 | length 787
  Top Layer w10: J0_1.0@1275,899.53 J1_1.0@1275,714.53 1404.23,714.53 1600,518.76 F0_1.2@1600,514.82 1604.82,510 TP0_1.1@1790,510
NetF0_2_2: F0_2.2 J0_2.0 J1_2.0 TP0_2.1 | length 694.4
  Top Layer w10: J1_2.0@1975,1855 J0_2.0@1975,2040 F0_2.2@1975,2279.02 2244.02,2279.02 TP0_2.1@2245,2280
NetF0_3_2: F0_3.2 J0_3.0 J1_3.0 TP0_3.1
NetF0_4_2: F0_4.2 J0_4.0 J1_4.0 TP0_4.1 | length 705.7
  Top Layer w10: J1_4.0@3374.29,1855 J0_4.0@3374.29,2040 F0_4.2@3374.29,2315 TP0_4.1@3620,2315
NetF0_5_2: F0_5.2 J0_5.0 J1_5.0 TP0_5.1 | length 576.1
  Top Layer w10: J0_5.0@4075,898.91 J1_5.0@4075,713.91 F0_5.2@4075,514.82 4079.82,510 TP0_5.1@4265,510
NetF0_6_2: F0_6.2 J0_6.0 J1_6.0 TP0_6.1 | length 705.7
  Top Layer w10: J1_6.0@4774.29,1855 J0_6.0@4774.29,2040 F0_6.2@4774.29,2315 TP0_6.1@5020,2315
NetF0_7_2: F0_7.2 J0_7.0 J1_7.0 TP0_7.1 | length 564.8
  Top Layer w10: TP0_7.1@5305,488.91 5449.09,488.91 F0_7.2@5475,514.82 J1_7.0@5475,713.91 J0_7.0@5475,898.91
NetF0_8_2: F0_8.2 J0_8.0 J1_8.0 TP0_8.1 | length 705.7
  Top Layer w10: J1_8.0@6174.29,1855 J0_8.0@6174.29,2040 F0_8.2@6174.29,2315 TP0_8.1@6420,2315
NetF0_9_2: F0_9.2 J0_9.0 J1_9.0 TP0_9.1 | length 564.8
  Top Layer w10: TP0_9.1@6705,488.91 6849.09,488.91 F0_9.2@6875,514.82 J1_9.0@6875,713.91 J0_9.0@6875,898.91
NetF0_10_2: F0_10.2 J0_10.0 J1_10.0 TP0_10.1 | length 705.7
  Top Layer w10: J1_10.0@7574.28,1855 J0_10.0@7574.28,2040 F0_10.2@7574.29,2315 TP0_10.1@7820,2315
NetF0_11_2: F0_11.2 J0_11.0 J1_11.0 TP0_11.1 | length 564.8
  Top Layer w10: TP0_11.1@8105,488.91 8249.09,488.91 F0_11.2@8275,514.82 J1_11.0@8275,713.91 J0_11.0@8275,898.91
NetF0_12_2: F0_12.2 J0_12.0 J1_12.0 TP0_12.1 | length 705.7
  Top Layer w10: J1_12.0@8974.29,1855 J0_12.0@8974.29,2040 F0_12.2@8974.29,2315 TP0_12.1@9220,2315
NetF0_13_2: F0_13.2 J0_13.0 J1_13.0 TP0_13.1 | length 564.8
  Top Layer w10: TP0_13.1@9505,488.91 9649.09,488.91 F0_13.2@9675,514.82 J1_13.0@9675,713.91 J0_13.0@9675,898.91
NetF0_14_2: F0_14.2 J0_14.0 J1_14.0 TP0_14.1 | length 705.7
  Top Layer w10: J1_14.0@10374.29,1855 J0_14.0@10374.29,2040 F0_14.2@10374.29,2315 TP0_14.1@10620,2315
NetF0_15_2: F0_15.2 J0_15.0 J1_15.0 TP0_15.1 | length 576.1
  Top Layer w10: J0_15.0@11075,898.91 J1_15.0@11075,713.91 F0_15.2@11075,514.82 11079.82,510 TP0_15.1@11265,510
NetF0_16_2: F0_16.2 J0_16.0 J1_16.0 TP0_16.1 | length 705.7
  Top Layer w10: J1_16.0@11774.29,1855 J0_16.0@11774.29,2040 F0_16.2@11774.29,2315 TP0_16.1@12020,2315
NetF0_17_2: F0_17.2 J0_17.0 J1_17.0 TP0_17.1 | length 564.8
  Top Layer w10: TP0_17.1@12305,488.91 12449.09,488.91 F0_17.2@12475,514.82 J1_17.0@12475,713.91 J0_17.0@12475,898.91
NetF0_18_2: F0_18.2 J0_18.0 J1_18.0 Vtop.1 | length 806.4
  Top Layer w10: F0_18.2@13355,319.02 13355.98,320 Vtop.1@13580,320 13575,325 J1_18.0@13575,713.91 J0_18.0@13575,898.91
NetF1_1: F1.1 J4.1 | length 352.5
  Top Layer w10: J4.1@1112.4,205 1265,205 1325.08,265.08 F1.1@1440,265.08
NetL1_2: L1.2 R5.1 T1.3
NetL1_3: L1.3 R4.2 T1.4
NetL2_2: L2.2 R18.2 T3.1
NetL2_3: L2.3 R19.1 T3.2
NetM0_1_1: M0_1.1 R1_1.2 | length 151
  Top Layer w10: M0_1.1@1802.6,285 1802.6,137.4 R1_1.2@1805,135
NetM0_1_3: M0_1.3 R2_1.2 R3_1.1 | length 441.6
  Top Layer w10: R3_1.1@1815,631.54 1868.96,631.54 1951.59,548.91 R2_1.2@1990,548.91 ; M0_1.3@1840,375 1840,386.5 R2_1.2@1996.21,542.71
NetM0_2_1: M0_2.1 R1_2.2 | length 575.7
  Top Layer w10: M0_2.1@1660,2332.6 1712.6,2332.6 1790,2410 R1_2.2@2203.66,2410
NetM0_2_3: M0_2.3 R2_2.2 R3_2.1 | length 402.6
  Top Layer w10: M0_2.3@1570,2370 R3_2.1@1570,2133.46 1732.38,2133.46 R2_2.2@1735,2136.09
NetM0_3_1: M0_3.1 R1_3.2
NetM0_3_3: M0_3.3 R2_3.2 R3_3.1
NetM0_4_1: M0_4.1 R1_4.2 | length 494.9
  Top Layer w10: M0_4.1@3205,2282.6 3247.6,2282.6 3280,2315 3280,2400 3335,2455 R1_4.2@3578.66,2455
NetM0_4_3: M0_4.3 R2_4.2 R3_4.1 | length 388.8
  Top Layer w10: R3_4.1@3005,2113.46 3005,2115.43 3115,2225.43 3115,2230 ; M0_4.3@3115,2320 3115,2230 ; R2_4.2@3170,2116.09 3170,2175 3115,2230
NetM0_5_1: M0_5.1 R1_5.2 | length 151.1
  Top Layer w10: R1_5.2@4275,135 4277.6,137.6 M0_5.1@4277.6,285
NetM0_5_3: M0_5.3 R2_5.2 R3_5.1 | length 592
  Top Layer w10: R3_5.1@4269.47,687.07 4439.25,687.07 R2_5.2@4460,707.82 4460,531.5 4315,386.5 M0_5.3@4315,375
NetM0_6_1: M0_6.1 R1_6.2 | length 364.6
  Top Layer w10: R1_6.2@5061.34,2490 5110,2490 M0_6.1@5326.2,2273.8 ; M0_6.1@5312.26,2273.6 5318.26,2267.6 M0_6.1@5320,2267.6
NetM0_6_3: M0_6.3 R2_6.2 R3_6.1 | length 507.5
  Top Layer w10: R2_6.2@5036.75,2123.25 5218.5,2305 M0_6.3@5230,2305 5225,2300 R3_6.1@5225,2118.47 ; R2_6.2@5040,2116.09 5054.14,2116.09 R2_6.2@5079.75,2141.7
NetM0_7_1: M0_7.1 R1_7.2 | length 120.5
  Top Layer w10: R1_7.2@5251.34,138.91 5252.6,140.17 M0_7.1@5252.6,258.91
NetM0_7_3: M0_7.3 R2_7.2 R3_7.1 | length 713
  Top Layer w10: R2_7.2@5150,707.82 5150,488.91 ; R3_7.1@5315,685.45 5315,653.91 5150,488.91 ; 5150,488.91 5272.64,366.27 ; 5272.64,366.27 M0_7.3@5290,348.91 5290,360.27 5284,366.27 5272.64,366.27
NetM0_8_1: M0_8.1 R1_8.2 | length 494.9
  Top Layer w10: M0_8.1@6005,2282.6 6047.6,2282.6 6080,2315 6080,2400 6135,2455 R1_8.2@6378.66,2455
NetM0_8_3: M0_8.3 R2_8.2 R3_8.1 | length 388.8
  Top Layer w10: R3_8.1@5805,2113.47 5805,2115.43 5915,2225.43 5915,2230 ; M0_8.3@5915,2320 5915,2230 ; R2_8.2@5970,2116.09 5970,2175 5915,2230
NetM0_9_1: M0_9.1 R1_9.2 | length 120.5
  Top Layer w10: R1_9.2@6651.34,138.91 6652.6,140.17 M0_9.1@6652.6,258.91
NetM0_9_3: M0_9.3 R2_9.2 R3_9.1 | length 713
  Top Layer w10: R2_9.2@6550,707.82 6550,488.91 ; R3_9.1@6715,685.45 6715,653.91 6550,488.91 ; 6550,488.91 6672.64,366.27 ; 6672.64,366.27 M0_9.3@6690,348.91 6690,360.27 6684,366.27 6672.64,366.27
NetM0_10_1: M0_10.1 R1_10.2 | length 494.9
  Top Layer w10: M0_10.1@7405,2282.6 7447.6,2282.6 7480,2315 7480,2400 7535,2455 R1_10.2@7778.66,2455
NetM0_10_3: M0_10.3 R2_10.2 R3_10.1 | length 388.8
  Top Layer w10: R3_10.1@7205,2113.46 7205,2115.43 7315,2225.43 7315,2230 ; M0_10.3@7315,2320 7315,2230 ; R2_10.2@7370,2116.09 7370,2175 7315,2230
NetM0_11_1: M0_11.1 R1_11.2 | length 120.5
  Top Layer w10: R1_11.2@8051.34,138.91 8052.6,140.17 M0_11.1@8052.6,258.91
NetM0_11_3: M0_11.3 R2_11.2 R3_11.1 | length 713
  Top Layer w10: R2_11.2@7950,707.82 7950,488.91 ; R3_11.1@8115,685.45 8115,653.91 7950,488.91 ; 7950,488.91 8072.64,366.27 ; 8072.64,366.27 8084,366.27 8090,360.27 M0_11.3@8090,348.91 8072.64,366.27
NetM0_12_1: M0_12.1 R1_12.2 | length 494.9
  Top Layer w10: M0_12.1@8805,2282.6 8847.6,2282.6 8880,2315 8880,2400 8935,2455 R1_12.2@9178.66,2455
NetM0_12_3: M0_12.3 R2_12.2 R3_12.1 | length 388.8
  Top Layer w10: R3_12.1@8605,2113.46 8605,2115.43 8715,2225.43 8715,2230 ; M0_12.3@8715,2320 8715,2230 ; R2_12.2@8770,2116.09 8770,2175 8715,2230
NetM0_13_1: M0_13.1 R1_13.2 | length 120.5
  Top Layer w10: R1_13.2@9451.34,138.91 9452.6,140.17 M0_13.1@9452.6,258.91
NetM0_13_3: M0_13.3 R2_13.2 R3_13.1 | length 713
  Top Layer w10: R2_13.2@9350,707.82 9350,488.91 ; R3_13.1@9515,685.45 9515,653.91 9350,488.91 ; 9350,488.91 9472.64,366.27 ; 9472.64,366.27 M0_13.3@9490,348.91 9490,360.27 9484,366.27 9472.64,366.27
NetM0_14_1: M0_14.1 R1_14.2 | length 364.6
  Top Layer w10: R1_14.2@10661.34,2490 10710,2490 M0_14.1@10926.2,2273.8 ; M0_14.1@10912.26,2273.6 10918.26,2267.6 M0_14.1@10920,2267.6
NetM0_14_3: M0_14.3 R2_14.2 R3_14.1 | length 507.5
  Top Layer w10: R2_14.2@10636.75,2123.25 10818.5,2305 M0_14.3@10830,2305 10825,2300 R3_14.1@10825,2118.46 ; R2_14.2@10640,2116.09 10654.14,2116.09 R2_14.2@10679.75,2141.7
NetM0_15_1: M0_15.1 R1_15.2 | length 151.1
  Top Layer w10: R1_15.2@11275,135 11277.6,137.6 M0_15.1@11277.6,285
NetM0_15_3: M0_15.3 R2_15.2 R3_15.1 | length 592
  Top Layer w10: R3_15.1@11269.47,687.07 11439.25,687.07 R2_15.2@11460,707.82 11460,531.5 11315,386.5 M0_15.3@11315,375
NetM0_16_1: M0_16.1 R1_16.2 | length 494.9
  Top Layer w10: M0_16.1@11605,2282.6 11647.6,2282.6 11680,2315 11680,2400 11735,2455 R1_16.2@11978.66,2455
NetM0_16_3: M0_16.3 R2_16.2 R3_16.1 | length 388.8
  Top Layer w10: R3_16.1@11405,2113.46 11405,2115.43 11515,2225.43 11515,2230 ; M0_16.3@11515,2320 11515,2230 ; R2_16.2@11570,2116.09 11570,2175 11515,2230
NetM0_17_1: M0_17.1 R1_17.2 | length 138.9
  Top Layer w10: R1_17.2@12216.34,135 12216.34,139.92 12252.6,176.18 M0_17.1@12252.6,258.91
NetM0_17_3: M0_17.3 R2_17.2 R3_17.1 | length 713
  Top Layer w10: R2_17.2@12150,707.82 12150,488.91 ; R3_17.1@12315,685.45 12315,653.91 12150,488.91 ; 12150,488.91 12272.64,366.27 ; 12272.64,366.27 12284,366.27 12290,360.27 M0_17.3@12290,348.91 12272.64,366.27
NetM0_18_1: M0_18.1 R1_18.2 | length 208.4
  Top Layer w10: M0_18.1@12957.4,825 12957.4,1029.73 R1_18.2@12960,1032.32
NetM0_18_3: M0_18.3 R2_18.2 R3_18.1 | length 421
  Top Layer w10: M0_18.3@12920,725 12815,620 R3_18.1@12815,518.46 12817.38,516.09 R2_18.2@12985,516.09
NetQ1_1: Q1.1 U1.38
NetQ2_1: Q2.1 U2.38
NetR21_2: R21.2 R22.1 U2.46
NetR22_2: R22.2 U2.45
NetR26_1: R26.1 U2.2 U2.4
NetR29_2: R29.2 R30.1 U1.46
NetR30_2: R30.2 U1.45
NetR31_1: R31.1 U1.2 U1.4
Out2-A: J5.3 T3.3
Out2-B: J5.2 T3.4
TopMuxTerm: C0_6.2 R13.1 U1.14
TopMuxTerm-2: C0_15.2 R27.1 U2.14
Vbot: C0_1.2 C1.2 C2.2 C3.2 C4.2 C5.2 C6.2 C7.2 C9.1 DS0_1.2 F1.2 J2.0 J3.0 J6.1 J6.2 J6.3 J6.4 J7.1 J7.2 J7.3 J7.4 R2_1.1 R29.1 U1.26 U1.30 U1.31 Vbot.1 | length 1201.9
  Top Layer w10: J2.0@175,711.09 J3.0@175,896.09 363.91,1085 Vbot.1@525,1085 ; v1(1395,835) C0_1.2@1497.1,835 ; v1(1405,630) 1440,595 F1.2@1440,520.98 ; DS0_1.2@1815,844.53 1898.15,844.53 1951.59,791.09 R2_1.1@1990,791.09 ; C5.2@4565,1899.53 C2.2@4565,2065.47
  other v1: 4565,1982.5
Vmid: C0_10.2 C8.1 C10.1 C11.2 C12.2 C13.2 C14.2 C15.2 C16.2 DS0_10.2 F0_9.1 M0_9.2 R0_9.2 R2_10.1 R6.1 R21.1 R28.2 R31.2 U2.26 U2.30 U2.31 Vmid.1 | length 408.7
  Top Layer w10: R0_9.2@6726.42,163.91 6727.4,164.9 M0_9.2@6727.4,258.91 F0_9.1@6875,258.91 ; DS0_10.2@7205,1875.47 7368.44,1875.47 R2_10.1@7370,1873.91
Vref2-1: C5.1 R7.1 R8.1 R9.1 R10.1 U1.34
Vref2-2: C14.1 R32.1 R33.1 R34.1 R35.1 U2.34
Vtop: F0_18.1 M0_18.2 R0_18.2 R20.2 R25.2 R26.2 | length 1035.9
  Top Layer w10: M0_18.2@12882.6,825 12905,825 13155.08,574.92 F0_18.1@13355,574.92 R0_18.2@13355,1034.84
pads on no net: J4.M1 J4.M2 J5.1 J5.M1 J5.M2 J6.M1 J6.M2 J7.M1 J7.M2 U1.3 U1.5 U1.15 U1.33 U1.36 U1.39 U1.43 U1.44 U2.3 U2.5 U2.15 U2.17 U2.33 U2.36 U2.39 U2.43 U2.44

## Silkscreen, mask and mechanical layers (free items; w line width, h text height)
Top Overlay:
  drawing of 14 lines, arcs and shapes, not listed
  text "BMS Slave Board / Rev 3.0 / 10/15/21" at -1330,-270 h78.74